# EAGLE board ESP32-C6-WROOM Breakout-Panel (EAGLE 9.6.2)
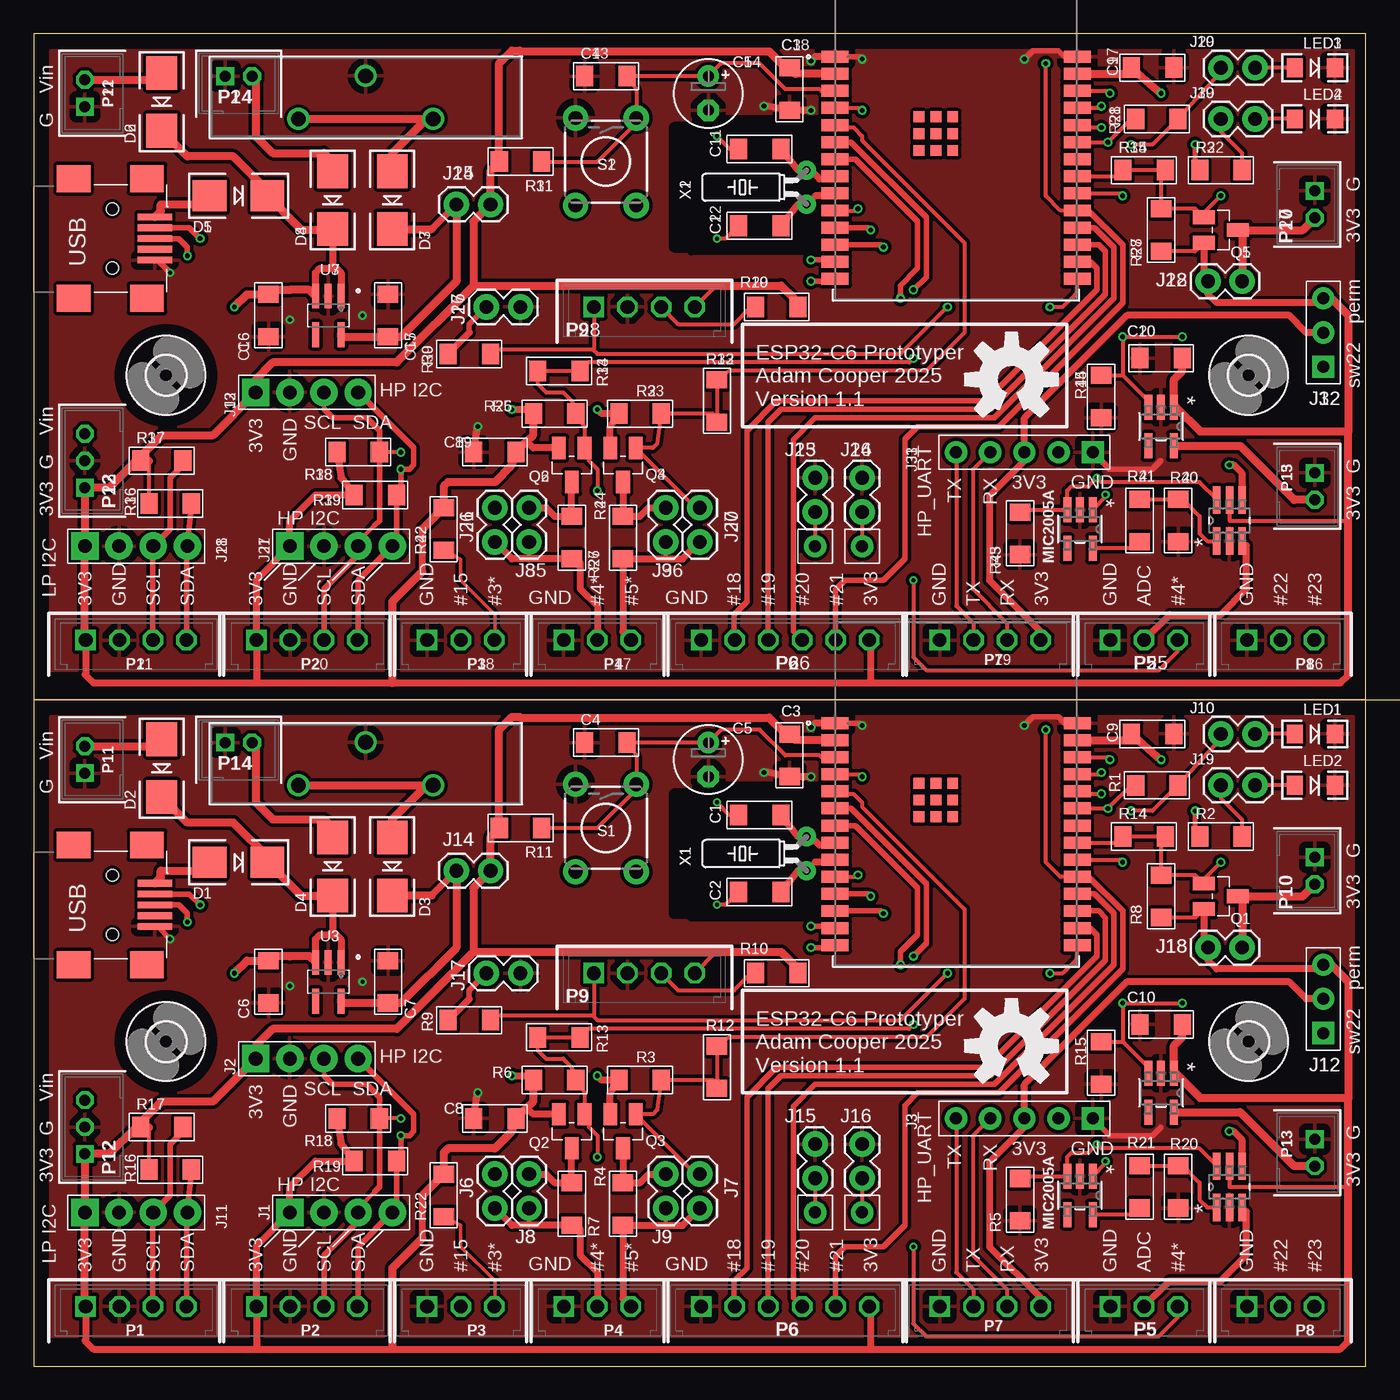
[diagram p0: board, top side]
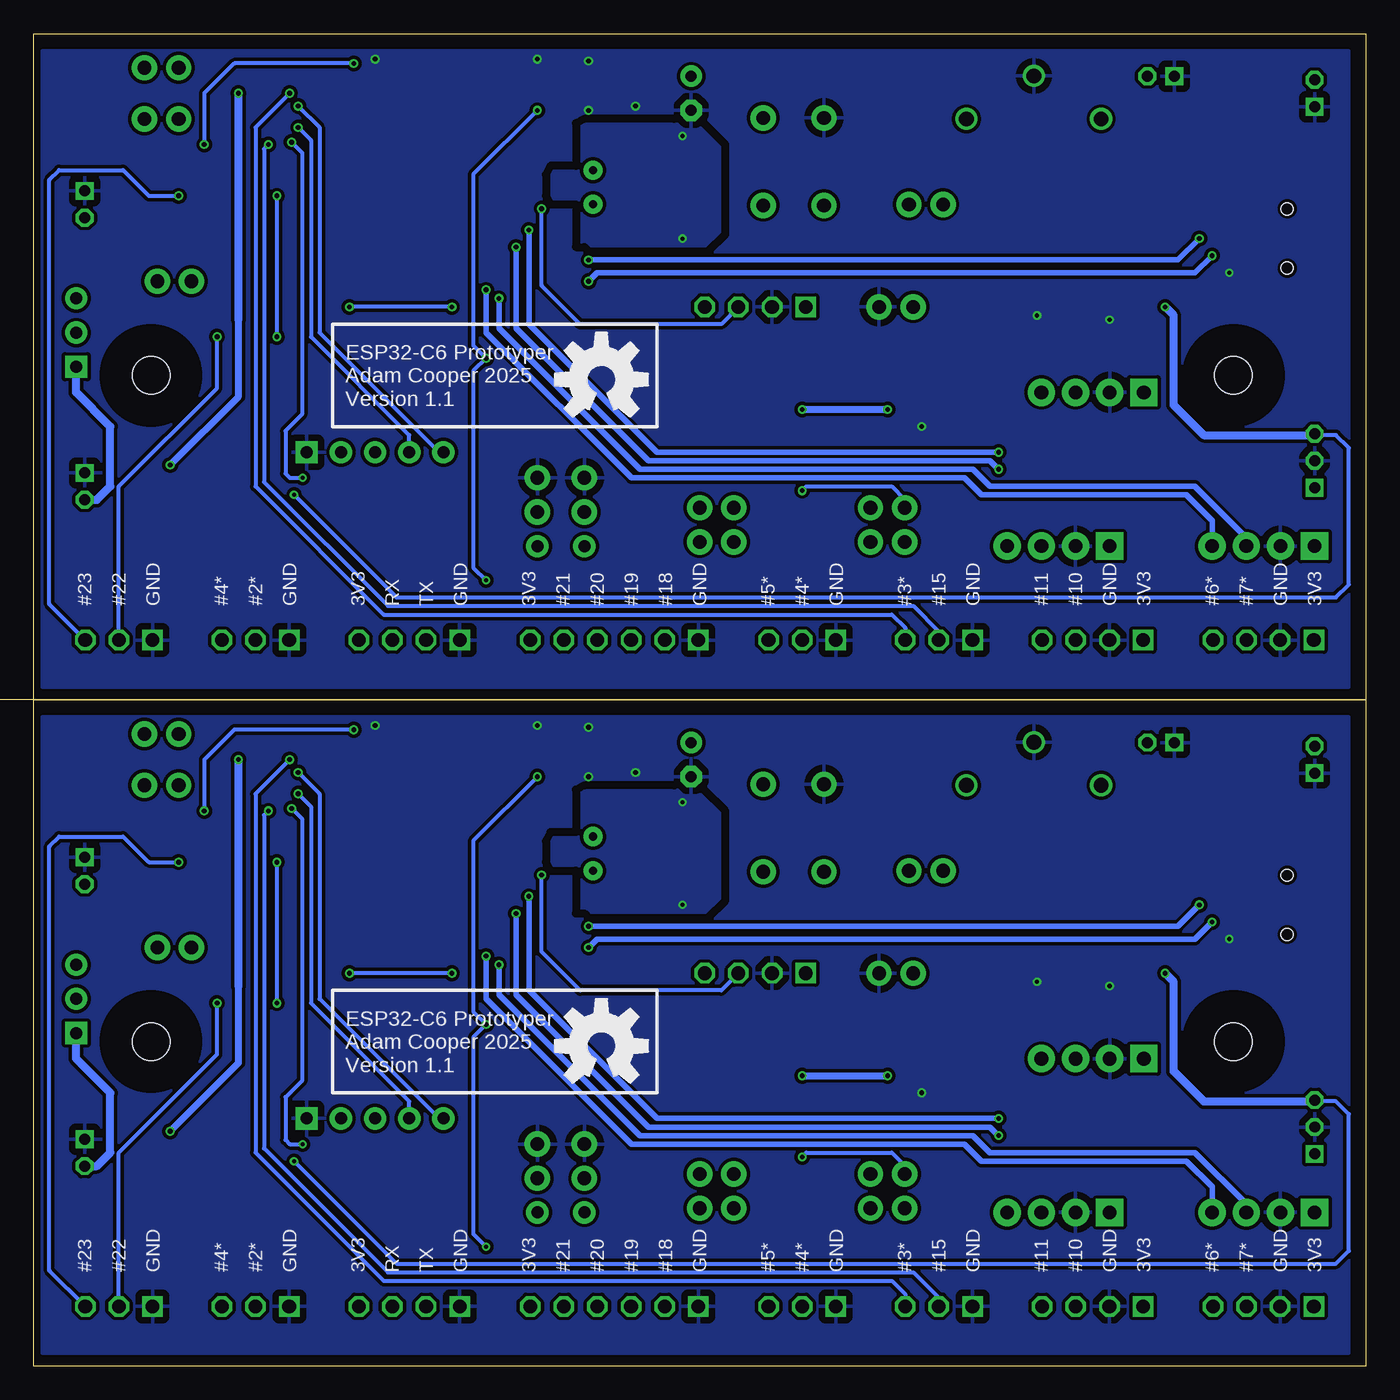
[diagram p1: board, bottom side, seen from below]

Size 99.05 x 99.04 mm. Coordinates in mm from the lower left corner, seen from the top.
Outline: 99.05,49.52 99.05,0 0,0 0,49.52
Outline: 99.05,49.52 0,49.52
Outline: 0,49.52 99.05,49.52
Outline: 99.05,49.52 99.05,99.04 0,99.04 0,49.52
Copper layers (1*16): Top 0.035mm / dielectric 1.5mm / Bottom 0.035mm
Design rules "Seeed Fusion_eagle_rule_v1.1 *": minimum track width 6mil, minimum drill 12mil, track to track 6mil, track to pad 6mil, pad to pad 6mil, via to via 6mil, smd to smd 0mil, copper to edge 10mil, drill to drill 10mil, minimum pad ring 10mil, minimum via ring 6mil, stop-mask expansion 2mil, vias tented up to drill 100mil, thermal gap 20mil
tRestrict: area 47.6,33.7 to 58.4,42.5; area 47.6,83.2 to 58.4,92.1; 16 lines
bRestrict: 30 lines
Milling: 1 lines

## Footprints (pad centres in the part's own frame; a part is rotated, then mirrored left to right if it is on the bottom)
COIN_2-1775485-1_TEC = drill 1.092 pad 1.6: 1 0,0; 2 5.004,3.2; 3 10.008,0
1206 = smd 1.27 x 1.524: 1 -1.575,0; 2 1.575,0
E2,5-5 = drill 0.813 pad 1.6: + -1.27,0 | drill 0.813 pad 1.6 octagon: - 1.27,0
DO-214AA = smd 2.5 x 2.3: A -2.15,0; C 2.15,0
2,8 = hole 2.8: 0,0
4P-2.54-80/40MIL = drill 1.016 pad 2.032 square: 1 0,3.81 | drill 1.016 pad 2.032: 2 0,1.27; 3 0,-1.27; 4 0,-3.81
5P-2.54 = drill 0.889 pad 1.651 square: 1 0,5.08 | drill 0.889 pad 1.651: 2 0,2.54; 3 0,0; 4 0,-2.54; 5 0,-5.08
1P-65/35MIL = drill 0.889 pad 1.651: P$1 0,0
1X02 = drill 1.016 pad 1.88: 1 0,0; 2 2.54,0
3P-2.54 = drill 0.889 pad 1.651 square: 1 0,2.54 | drill 0.889 pad 1.651: 2 0,0; 3 0,-2.54
LED-1206 = smd 1.2 x 1.4: A -1.5,0; C 1.5,0
B4B-EH-A = drill 1.016 square: 1 -3.75,0 | drill 1.016 octagon: 2 -1.25,0; 3 1.25,0; 4 3.75,0
B3B-EH-A = drill 1.016 square: 1 -2.5,0 | drill 1.016 octagon: 2 0,0; 3 2.5,0
B6B-EH-A = drill 1.016 square: 1 -6.25,0 | drill 1.016 octagon: 2 -3.75,0; 3 -1.25,0; 4 1.25,0; 5 3.75,0; 6 6.25,0
B2B-PH-K = drill 0.813 square: 1 -1,0 | drill 0.813 octagon: 2 1,0
B3B-PH-K = drill 0.813 square: 1 -2,0 | drill 0.813 octagon: 2 0,0; 3 2,0
SOT23_LONG = smd 1.016 x 1.651: 1 -0.95,-1.27; 2 0.95,-1.27; 3 0,1.27
TACTILE-PTH = drill 1.016 pad 1.88: 1 -3.251,2.261; 2 3.251,2.261; 3 -3.251,-2.261; 4 3.251,-2.261
DBV6 = smd 2.032 x 0.559: 1 -1.524,0.95; 2 -1.524,0; 3 -1.524,-0.95; 4 1.524,-0.95; 5 1.524,0; 6 1.524,0.95
MOD28_ESP32-C6-WROOM-1_LONG = smd 2.007 x 0.889: 1 -9.004,5.26; 2 -9.004,3.99; 3 -9.004,2.72; 4 -9.004,1.45; 5 -9.004,0.18; 6 -9.004,-1.09; 7 -9.004,-2.36; 8 -9.004,-3.63; 9 -9.004,-4.9; 10 -9.004,-6.17; 11 -9.004,-7.44; 12 -9.004,-8.71; 13 -9.004,-9.98; 14 -9.004,-11.25; 15 9.004,-11.25; 16 9.004,-9.98; 17 9.004,-8.71; 18 9.004,-7.44; 19 9.004,-6.17; 20 9.004,-4.9; 21 9.004,-3.63; 22 9.004,-2.36; 23 9.004,-1.09; 24 9.004,0.18; 25 9.004,1.45; 26 9.004,2.72; 27 9.004,3.99; 28 9.004,5.26 | smd 0.813 x 0.813: 29 -1.505,-0.46; 30 -2.755,0.79; 31 -2.755,-0.46; 32 -2.755,-1.71; 33 -1.505,-1.71; 34 -0.255,-1.71; 35 -0.255,-0.46; 36 -0.255,0.79; 37 -1.505,0.79
SOT95-LONGPADS = smd 1.858 x 0.6: 1 -1.439,0.95; 2 -1.439,0; 3 -1.439,-0.95; 4 1.439,-0.95; 5 1.439,0.95
SOT-23-5_M5_MCH-M = smd 1.857 x 0.597: 1 -1.439,0.95; 2 -1.439,0; 3 -1.439,-0.95; 4 1.439,-0.95; 5 1.439,0.95
FCI_USB_B_SMD_LONG = smd 0.5 x 2.54: D+ 0,9.017; D- -0.8,9.017; GND 1.6,9.017; ID 0.8,9.017; VCC -1.6,9.017 | smd 2 x 2.5: SH$1 -4.45,8.43; SH$2 4.45,8.43; SH$3 4.45,2.98; SH$4 -4.45,2.98 | hole 0.9: -2.2,5.85; 2.2,5.85
TC26H = drill 0.6 pad 1.422: 1 -1.27,0; 2 1.27,0

## Placement (x,y rotation side)
BAT1  2-1775485-1  [COIN_2-1775485-1_TEC]  19.68,43.18 0 top
BAT2  2-1775485-1  [COIN_2-1775485-1_TEC]  19.68,92.7 0 top
C1  18p  [1206]  53.98,40.96 0 top
C2  18p  [1206]  53.98,35.24 0 top
C3  100n  [1206]  56.2,45.4 270 top
C4  100n  [1206]  42.55,46.35 0 top
C5  1u  [E2,5-5]  50.16,45.09 270 top
C6  1u  [1206]  17.46,28.57 270 top
C7  1u  [1206]  26.35,28.57 90 top
C8  10u  [1206]  34.29,18.41 180 top
C9  100n  [1206]  83.19,46.99 0 top
C10  10u  [1206]  83.82,25.4 0 top
C11  18p  [1206]  53.98,90.48 0 top
C12  18p  [1206]  53.98,84.76 0 top
C13  100n  [1206]  42.55,95.87 0 top
C14  1u  [E2,5-5]  50.16,94.6 270 top
C15  1u  [1206]  26.35,78.09 90 top
C16  1u  [1206]  17.46,78.09 270 top
C17  100n  [1206]  83.19,96.51 0 top
C18  100n  [1206]  56.2,94.92 270 top
C19  10u  [1206]  34.29,67.93 180 top
C20  10u  [1206]  83.82,74.92 0 top
D1  SL115B  [DO-214AA]  15.24,37.47 0 top
D2  SL115B  [DO-214AA]  9.53,44.45 270 top
D3  SL115B  [DO-214AA]  26.67,37.15 270 top
D4  SL115B  [DO-214AA]  22.23,37.15 270 top
D5  SL115B  [DO-214AA]  15.24,86.98 0 top
D6  SL115B  [DO-214AA]  9.53,93.97 270 top
D7  SL115B  [DO-214AA]  26.67,86.67 270 top
D8  SL115B  [DO-214AA]  22.23,86.67 270 top
H1  MOUNT-HOLE2.8  [2,8]  9.84,24.13 0 top
H2  MOUNT-HOLE2.8  [2,8]  90.32,24.13 0 top
H3  MOUNT-HOLE2.8  [2,8]  9.84,73.65 0 top
H4  MOUNT-HOLE2.8  [2,8]  90.32,73.65 0 top
J1  HP I2C  [4P-2.54-80/40MIL]  22.86,11.43 90 top
J2  HP I2C  [4P-2.54-80/40MIL]  20.32,22.86 90 top
J3  HP_UART  [5P-2.54]  73.66,18.41 270 top
J4  [1P-65/35MIL]  58.1,11.43 0 top
J5  [1P-65/35MIL]  61.59,11.43 0 top
J6  [1X02]  34.29,11.75 90 top
J7  [1X02]  49.53,11.75 90 top
J8  [1X02]  36.83,14.29 270 top
J9  [1X02]  46.99,14.29 270 top
J10  [1X02]  90.81,46.99 180 top
J11  LP I2C  [4P-2.54-80/40MIL]  7.62,11.43 90 top
J12  UART Vcc  [3P-2.54]  95.89,27.3 180 top
J13  HP I2C  [4P-2.54-80/40MIL]  20.32,72.38 90 top
J14  I_measure  [1X02]  31.43,36.83 0 top
J15  [1X02]  58.1,13.97 90 top
J16  [1X02]  61.59,13.97 90 top
J17  BOOT  [1X02]  33.66,29.21 0 top
J18  [1X02]  87.31,31.11 0 top
J19  [1X02]  90.81,43.18 180 top
J20  [1X02]  49.53,61.27 90 top
J21  [1X02]  34.29,61.27 90 top
J22  [1X02]  87.31,80.63 0 top
J23  [1X02]  58.1,63.49 90 top
J24  [1X02]  61.59,63.49 90 top
J25  I_measure  [1X02]  31.43,86.35 0 top
J26  BOOT  [1X02]  33.66,78.73 0 top
J27  HP I2C  [4P-2.54-80/40MIL]  22.86,60.95 90 top
J28  LP I2C  [4P-2.54-80/40MIL]  7.62,60.95 90 top
J29  [1X02]  90.81,96.51 180 top
J30  [1X02]  90.81,92.7 180 top
J31  HP_UART  [5P-2.54]  73.66,67.93 270 top
J32  UART Vcc  [3P-2.54]  95.89,76.82 180 top
J33  [1P-65/35MIL]  58.1,60.95 0 top
J34  [1P-65/35MIL]  61.59,60.95 0 top
J35  [1X02]  36.83,63.81 270 top
J36  [1X02]  46.99,63.81 270 top
LED1  [LED-1206]  95.25,46.99 0 top
LED2  [LED-1206]  95.25,43.18 0 top
LED3  [LED-1206]  95.25,96.51 0 top
LED4  [LED-1206]  95.25,92.7 0 top
LOGO1  OSHW-LOGOL  [OSHW-LOGO-L]  72.71,23.81 0 top
LOGO2  OSHW-LOGOL  [OSHW-LOGO-L]  56.83,23.81 0 bottom
LOGO3  OSHW-LOGOL  [OSHW-LOGO-L]  72.71,73.33 0 top
LOGO4  OSHW-LOGOL  [OSHW-LOGO-L]  56.83,73.33 0 bottom
P1  LP_I2C  [B4B-EH-A]  7.62,4.45 0 top
P2  HP_I2C  [B4B-EH-A]  20.32,4.45 0 top
P3  CTRL  [B3B-EH-A]  31.75,4.45 0 top
P4  HI DRV/CNT  [B3B-EH-A]  41.91,4.45 0 top
P5  ADC (ext batt)  [B3B-EH-A]  82.55,4.45 0 top
P6  GPIO-A1  [B6B-EH-A]  55.88,4.45 0 top
P7  HP_UART  [B4B-EH-A]  71.12,4.45 0 top
P8  GPIO-A2  [B3B-EH-A]  92.71,4.45 0 top
P9  GPIO-B  [B4B-EH-A]  45.4,29.21 0 top
P10  Pwr Sw 23  [B2B-PH-K]  95.25,36.83 270 top
P11  Battery  [B2B-PH-K]  3.81,45.09 90 top
P12  Pwr Out  [B3B-PH-K]  3.81,17.78 90 top
P13  Pwr Sw 22  [B2B-PH-K]  95.25,15.88 270 top
P14  Backup  [B2B-PH-K]  15.24,46.35 0 top
P15  Pwr Sw 22  [B2B-PH-K]  95.25,65.39 270 top
P16  GPIO-A2  [B3B-EH-A]  92.71,53.96 0 top
P17  HI DRV/CNT  [B3B-EH-A]  41.91,53.96 0 top
P18  CTRL  [B3B-EH-A]  31.75,53.96 0 top
P19  HP_UART  [B4B-EH-A]  71.12,53.96 0 top
P20  HP_I2C  [B4B-EH-A]  20.32,53.96 0 top
P21  LP_I2C  [B4B-EH-A]  7.62,53.96 0 top
P22  Battery  [B2B-PH-K]  3.81,94.6 90 top
P23  Pwr Out  [B3B-PH-K]  3.81,67.3 90 top
P24  Backup  [B2B-PH-K]  15.24,95.87 0 top
P25  ADC (ext batt)  [B3B-EH-A]  82.55,53.96 0 top
P26  GPIO-A1  [B6B-EH-A]  55.88,53.96 0 top
P27  Pwr Sw 23  [B2B-PH-K]  95.25,86.35 270 top
P28  GPIO-B  [B4B-EH-A]  45.4,78.73 0 top
Q1  FDN338P  [SOT23_LONG]  88.27,34.92 270 top
Q2  FDN338P  [SOT23_LONG]  40.01,17.46 180 top
Q3  FDN338P  [SOT23_LONG]  43.81,17.46 180 top
Q4  FDN338P  [SOT23_LONG]  43.81,66.98 180 top
Q5  FDN338P  [SOT23_LONG]  88.27,84.44 270 top
Q6  FDN338P  [SOT23_LONG]  40.01,66.98 180 top
R1  [1206]  83.5,43.18 180 top
R2  [1206]  88.27,39.37 0 top
R3  10k  [1206]  45.09,21.27 180 top
R4  [1206]  43.81,12.06 270 top
R5  10k  [1206]  73.34,12.38 270 top
R6  10k  [1206]  38.73,21.27 180 top
R7  [1206]  40.01,12.06 270 top
R8  10k  [1206]  83.82,34.92 270 top
R9  470  [1206]  32.38,25.72 0 top
R10  3k3  [1206]  55.24,29.21 0 top
R11  10k  [1206]  36.2,40.01 180 top
R12  [1206]  50.8,22.23 90 top
R13  [1206]  39.05,24.45 0 top
R14  [1206]  82.55,39.37 0 top
R15  10k  [1206]  79.38,22.54 270 top
R16  4k7  [1206]  10.16,14.61 0 top
R17  4k7  [1206]  9.53,17.78 0 top
R18  4k7  [1206]  24.13,18.41 180 top
R19  4k7  [1206]  25.4,15.24 180 top
R20  10k  [1206]  85.09,13.34 270 top
R21  22k  [1206]  82.23,13.34 270 top
R22  22k  [1206]  30.48,12.7 90 top
R23  10k  [1206]  45.09,70.79 180 top
R24  [1206]  43.81,61.58 270 top
R25  10k  [1206]  38.73,70.79 180 top
R26  [1206]  40.01,61.58 270 top
R27  10k  [1206]  83.82,84.44 270 top
R28  [1206]  83.5,92.7 180 top
R29  3k3  [1206]  55.24,78.73 0 top
R30  470  [1206]  32.38,75.24 0 top
R31  10k  [1206]  36.2,89.52 180 top
R32  [1206]  88.27,88.89 0 top
R33  [1206]  50.8,71.74 90 top
R34  [1206]  39.05,73.97 0 top
R35  [1206]  82.55,88.89 0 top
R36  4k7  [1206]  10.16,64.12 0 top
R37  4k7  [1206]  9.53,67.3 0 top
R38  4k7  [1206]  24.13,67.93 180 top
R39  4k7  [1206]  25.4,64.76 180 top
R40  10k  [1206]  85.09,62.85 270 top
R41  22k  [1206]  82.23,62.85 270 top
R42  22k  [1206]  30.48,62.22 90 top
R43  10k  [1206]  73.34,61.9 270 top
R44  10k  [1206]  79.38,72.06 270 top
S1  RESET  [TACTILE-PTH]  42.55,40.01 270 top
S2  RESET  [TACTILE-PTH]  42.55,89.52 270 top
U1  74LVC1G3157  [DBV6]  88.9,13.34 90 top
U2  ESP32-C6-WROOM-1-N4LONG  [MOD28_ESP32-C6-WROOM-1_LONG]  68.58,42.55 0 top
U3  RT9080-33  [SOT95-LONGPADS]  21.91,28.57 270 top
U4  MIC2005A-1YM5  [SOT-23-5_M5_MCH-M]  83.82,20.32 270 top
U5  MIC2005A-1YM5  [SOT-23-5_M5_MCH-M]  77.79,12.7 270 top
U6  ESP32-C6-WROOM-1-N4LONG  [MOD28_ESP32-C6-WROOM-1_LONG]  68.58,92.06 0 top
U7  RT9080-33  [SOT95-LONGPADS]  21.91,78.09 270 top
U8  74LVC1G3157  [DBV6]  88.9,62.85 90 top
U9  MIC2005A-1YM5  [SOT-23-5_M5_MCH-M]  83.82,69.84 270 top
U10  MIC2005A-1YM5  [SOT-23-5_M5_MCH-M]  77.79,62.22 270 top
USB1  [FCI_USB_B_SMD_LONG]  0,34.29 270 top
USB2  [FCI_USB_B_SMD_LONG]  0,83.81 270 top
X1  CFS-20632768EZFB  [TC26H]  57.47,38.1 90 top
X2  CFS-20632768EZFB  [TC26H]  57.47,87.62 90 top

## Library data of the parts
BAT1 BAT2 C1-C20 D1-D8 H1-H4 J6-J10 J14-J26 J29 J30 J35 J36 LED1-LED4 LOGO1-LOGO4 Q1-Q6 R1-R44 S1 S2 USB1 USB2 X1 X2 = Master 2016
J1-J5 J11-J13 J27 J28 J31-J34 = Connector
P1-P9 P16-P21 P25 P26 P28 = con-jst-eh
P10-P15 P22-P24 P27 = con-jst-ph
U1 U8 = ESP32 Projects; COPYRIGHT: Copyright (C) 2025 Ultra Librarian. All rights reserved.; MANUFACTURER_PART_NUMBER: SN74LVC1G3157DBVR; MFR_NAME: Texas Instruments
U2 U6 = SMD Stamp Modules
U3 U7 = AP2112K-3.3TRG1
U4 U5 U9 U10 = ESP32 Projects; COPYRIGHT: Copyright (C) 2025 Ultra Librarian. All rights reserved.; MANUFACTURER_NAME: Microchip; MANUFACTURER_PART_NUMBER: MIC2005A-1YM5-TR

## Nets
ADC: C9.1 U1.4 U2.27
ADC1: C17.1 U6.27 U8.4
ADC_EXT: P5.2 U1.3
ADC_EXT1: P25.2 U8.3
CHIP_EN: C4.2 C5.+ R11.1 S1.1 U2.3
CHIP_EN1: C13.2 C14.+ R31.1 S2.1 U6.3
GND: BAT1.2 C1.1 C2.1 C3.2 C4.1 C5.- C6.2 C7.2 C8.2 C9.2 C10.1 J1.2 J2.2 J3.1 J11.2 J15.2 J16.2 J17.2 LED1.C LED2.C P1.2 P2.2 P3.1 P4.1 P5.1 P6.1 P7.1 P8.1 P9.2 P10.1 P11.1 P12.2 P13.1 P14.1 R5.2 R15.2 R20.2 S1.3 U1.2 U2.1 U2.28 U3.2 U4.2 U5.2 USB1.GND
GND1: BAT2.2 C11.1 C12.1 C13.1 C14.- C15.2 C16.2 C17.2 C18.2 C19.2 C20.1 J13.2 J23.2 J24.2 J26.2 J27.2 J28.2 J31.1 LED3.C LED4.C P15.1 P16.1 P17.1 P18.1 P19.1 P20.2 P21.2 P22.1 P23.2 P24.1 P25.1 P26.1 P27.1 P28.2 R40.2 R43.2 R44.2 S2.3 U6.1 U6.28 U7.2 U8.2 U9.2 U10.2 USB2.GND
GPIO0: C1.2 U2.8 X1.2
GPIO1: C2.2 U2.9 X1.1
GPIO2: USB2.D+
GPIO3: U6.13 USB2.D-
GPIO4: C11.2 U6.8 X2.2
GPIO5: C12.2 U6.9 X2.1
GPIO6: R28.2 R43.1 U6.23 U8.6 U10.3
GPIO7: P28.3 R29.1 U6.10
GPIO8: P9.3 R10.1 U2.10
GPIO9: P9.1 R9.2 U2.15
GPIO10: J1.3 J2.3 P2.3 R18.1 U2.11
GPIO11: J1.4 J2.4 P2.4 R19.1 U2.12
GPIO12: U2.13 USB1.D-
GPIO13: U2.14 USB1.D+
GPIO14: P28.1 R30.2 U6.15
GPIO15: R1.2 R5.1 U1.6 U2.23 U5.3
GPIO15_R: J10.2 P3.2 R1.1
GPIO15_R1: J29.2 P18.2 R28.1
GPIO16: J13.3 J27.3 P20.3 R38.1 U6.11
GPIO17: J13.4 J27.4 P20.4 R39.1 U6.12
GPIO18: P6.2 U2.16
GPIO19: P6.3 U2.17
GPIO20: P6.4 U2.18
GPIO21: P6.5 R2.1 U2.19
GPIO22: P8.2 R15.1 U2.20 U4.3
GPIO23: P8.3 Q1.1 R8.1 R14.1 R14.2 U2.21
GPIO24: P26.2 U6.16
GPIO25: P26.3 U6.17
GPIO26: P26.4 U6.18
GPIO27: P26.5 R32.1 U6.19
GPIO28: P16.2 R44.1 U6.20 U9.3
GPIO29: P16.3 Q5.1 R27.1 R35.1 R35.2 U6.21
LP_GPIO1: P18.3 R42.1 U6.26
LP_GPIO2: J21.2 P25.3 Q6.1 R25.1 R34.1 R34.2 U6.4
LP_GPIO3: P3.3 R22.1 U2.26
LP_GPIO4: J6.2 P5.3 Q2.1 R6.1 R13.1 R13.2 U2.4
LP_GPIO4_P: J6.1 J8.2 P4.2 R7.2
LP_GPIO4_P1: J21.1 J35.2 P17.2 R26.2
LP_GPIO5: J7.2 Q3.1 R3.1 R12.1 R12.2 U2.5
LP_GPIO5_P: J7.1 J9.2 P4.3 R4.2
LP_GPIO5_P1: J20.1 J36.2 P17.3 R24.2
LP_GPIO6: J11.4 P1.4 R16.2 U2.6
LP_GPIO7: J11.3 P1.3 R17.2 U2.7
LP_GPIO8: J20.2 Q4.1 R23.1 R33.1 R33.2 U6.5
LP_GPIO9: J28.4 P21.4 R36.2 U6.6
LP_GPIO10: J28.3 P21.3 R37.2 U6.7
N$1: J17.1 R9.1
N$2: D2.A P11.2
N$3: D1.A USB1.VCC
N$4: D4.A P14.2
N$5: J18.2 P10.2 Q1.3
N$6: BAT1.1 BAT1.3 D3.A
N$7: J9.1 Q3.3 R4.1
N$8: J10.1 LED1.A
N$9: J5.P$1 J16.1
N$10: J19.2 R2.2
N$11: J19.1 LED2.A
N$12: J8.1 Q2.3 R7.1
N$13: C7.1 D3.C J14.1 U3.5
N$14: D5.A USB2.VCC
N$15: R21.2 U5.5
N$16: J4.P$1 J15.1
N$17: J36.1 Q4.3 R24.1
N$18: J35.1 Q6.3 R26.1
N$19: J26.1 R30.1
N$20: BAT2.1 BAT2.3 D7.A
N$21: J29.1 LED3.A
N$22: J30.2 R32.2
N$23: J30.1 LED4.A
N$24: C15.1 D7.C J25.1 U7.5
N$25: J24.1 J34.P$1
N$26: J23.1 J33.P$1
N$27: D8.A P24.2
N$28: D6.A P22.2
N$29: J22.2 P27.2 Q5.3
N$30: R41.2 U10.5
PWR_SW_1: J32.1 P15.2 U9.5
PWR_SW_22: J12.1 P13.2 U4.5
RX: J3.4 P7.3 U2.24
RX1: J31.4 P19.3 U6.24
TX: J3.5 P7.2 U2.25
TX1: J31.5 P19.2 U6.25
UART_VCC: J3.3 J12.2 P7.4
UART_VCC1: J31.3 J32.2 P19.4
VCC: C3.1 C8.1 C10.2 J1.1 J2.1 J11.1 J12.3 J14.2 J18.1 P1.1 P2.1 P6.6 P9.4 P12.1 Q1.2 Q2.2 Q3.2 R3.2 R6.2 R8.2 R10.2 R11.2 R16.1 R17.1 R18.2 R19.2 R22.2 U1.5 U2.2 U4.1
VCC1: C18.1 C19.1 C20.2 J13.1 J22.1 J25.2 J27.1 J28.1 J32.3 P20.1 P21.1 P23.1 P26.6 P28.4 Q4.2 Q5.2 Q6.2 R23.2 R25.2 R27.2 R29.2 R31.2 R36.1 R37.1 R38.2 R39.2 R42.2 U6.2 U8.5 U9.1
VIN: C6.1 D1.C D2.C D4.C P12.3 U3.1 U3.3 U5.1
VIN1: C16.1 D5.C D6.C D8.C P23.3 U7.3 U10.1
VIN_DIV: R20.1 R21.1 U1.1
VIN_DIV1: R40.1 R41.1 U8.1

## Tracks (layer width: path | path; a pad name or v marks a point on that pad's centre or on a via)
ADC  (via drill 0.35)
  Top 0.152: 81.46,46.53 C9.1
  Top 0.508: U1.4 89.85,16.83 89.22,17.46 v88.9,17.46
  Top 0.61: U2.27 81.46,46.53 | C9.1 v83.82,45.09
  Bottom 0.508: v88.9,17.46 83.82,22.54 83.82,28.26
  Bottom 0.61: 83.82,28.26 v83.82,45.09
ADC1  (via drill 0.35)
  Top 0.152: 81.46,96.06 C17.1
  Top 0.508: U8.4 89.85,66.35 89.22,66.98 v88.9,66.98
  Top 0.61: U6.27 81.46,96.06 | C17.1 v83.82,94.61
  Bottom 0.508: v88.9,66.98 83.82,72.06 83.82,77.78
  Bottom 0.61: 83.82,77.78 v83.82,94.61
ADC_EXT
  Top 0.305: 90.17,11.49 U1.3
  Top 0.508: P5.2 84.45,6.35 88.27,6.35 90.17,8.26 90.17,11.49
ADC_EXT1
  Top 0.305: 90.17,61.01 U8.3
  Top 0.508: P25.2 84.45,55.87 88.27,55.87 90.17,57.77 90.17,61.01
CHIP_EN
  Top 0.305: U2.3 58.56,45.27 58.42,45.4 55.88,45.4 53.98,47.31 51.12,47.31 C5.+ C4.2 44.81,45.36 S1.1 44.81,42.9 41.91,40.01 R11.1
CHIP_EN1
  Top 0.305: U6.3 58.56,94.78 58.42,94.92 55.88,94.92 53.98,96.83 51.12,96.83 C14.+ C13.2 44.81,94.88 S2.1 44.81,92.42 41.91,89.53 R31.1
GND  (via drill 0.3 pad 0.61, 0.35)
  Top 0.305: U2.28 76.66,47.8 | 58.1,47.8 v57.78,47.49 | C1.1 51.75,40.96 v50.8,41.91 | C2.1 51.45,34.29 v50.8,34.29
  Top 0.406: U2.1 61.41,47.8 v61.59,47.62 | 76.66,47.8 76.2,48.26 74.3,48.26 v73.66,47.62 | 83.82,17.78 83.19,17.14 80.01,17.14 J3.1 | USB1.GND 9.22,32.69 v10.16,31.75
  Top 0.508: v54.29,44.13 54.39,44.17 C3.2 57.19,43.83 57.2,43.76 57.25,43.81 v57.78,43.81 | U2.1 58.1,47.8 | C8.2 v33.02,20.32
  Top 0.61: 82.55,25.4 C10.1 | C6.2 17.79,27 | C7.2 26.02,30.15
  other vias: 19.05,28.26 24.45,28.57
  pour Bottom (isolate 0.254): 1.27,48.26 1.27,0.95 98.42,0.95 98.42,48.26
  pour Top (isolate 0.254): 1.27,48.26 1.27,2.22 98.11,2.22 98.11,48.26
GND1  (via drill 0.3 pad 0.61, 0.35)
  Top 0.305: U6.28 76.66,97.33 | 58.1,97.33 v57.78,97.01 | C11.1 51.75,90.48 v50.8,91.43 | C12.1 51.45,83.81 v50.8,83.81
  Top 0.406: U6.1 61.41,97.33 v61.59,97.14 | 76.66,97.33 76.2,97.78 74.3,97.78 v73.66,97.14 | 83.82,67.3 83.19,66.67 80.01,66.67 J31.1 | USB2.GND 9.22,82.21 v10.16,81.27
  Top 0.508: v54.29,93.65 54.39,93.69 C18.2 57.19,93.35 57.2,93.28 57.25,93.33 v57.78,93.33 | U6.1 58.1,97.33 | C19.2 v33.02,69.84
  Top 0.61: 82.55,74.92 C20.1 | C16.2 17.79,76.52 | C15.2 26.02,79.67
  other vias: 19.05,77.78 24.45,78.09
  pour Bottom (isolate 0.254): 1.27,97.78 1.27,50.47 98.42,50.47 98.42,97.78
  pour Top (isolate 0.254): 1.27,97.78 1.27,51.74 98.11,51.74 98.11,97.78
GPIO0
  Top 0.305: 56.83,39.37 X1.2 57.78,39.05 58.1,39.05 | 58.42,38.73 59.65,38.73 U2.8
  Top 0.508: 56.83,39.37 C1.2 | 58.1,39.05 58.42,38.73
GPIO1
  Top 0.305: U2.9 59.65,37.47 | 58.1,37.47 X1.1 56.83,36.83
  Top 0.508: 59.65,37.47 58.1,37.47 | 56.83,36.83 C2.2
GPIO2  (via drill 0.35)
  Top 0.406: v57.78,80.64 59.65,80.64 | USB2.D+ 10.79,83.81 11.43,83.17 v11.43,82.54
  Bottom 0.406: v57.78,80.64 57.15,81.27 12.7,81.27 v11.43,82.54
GPIO3  (via drill 0.35)
  Top 0.305: U6.13 59.69,82.22
  Top 0.406: 59.69,82.22 v57.78,82.22 | USB2.D- 11.58,84.61 v12.38,83.81
  Bottom 0.406: v12.38,83.81 13.97,82.22 v57.78,82.22
GPIO4
  Top 0.305: 56.83,88.89 X2.2 57.78,88.57 58.1,88.57 | 58.42,88.25 59.65,88.25 U6.8
  Top 0.508: 56.83,88.89 C11.2 | 58.1,88.57 58.42,88.25
GPIO5
  Top 0.305: U6.9 59.65,86.98 | 58.1,86.98 X2.1 56.83,86.35
  Top 0.508: 59.65,86.98 58.1,86.98 | 56.83,86.35 C12.2
GPIO6  (via drill 0.3 pad 0.61, 0.35)
  Top 0.305: U6.23 v79.87,90.97 81.75,92.85 R28.2 | U8.6 87.95,64.44 86.68,65.71 79.38,65.71 v79.06,66.03 78.42,65.39 77.15,65.39 76.84,65.08 U10.3 73.52,63.66 R43.1
  Bottom 0.305: v79.87,90.97 79.06,90.16 79.06,70.79 80.33,69.52 80.33,66.35 80.01,66.03 v79.06,66.03
GPIO7  (via drill 0.35)
  Top 0.305: U6.10 61.14,85.89 v61.28,86.03 | P28.3 47.92,77.46 52.07,77.46 53.34,78.73 R29.1
  Bottom 0.305: v61.28,86.03 61.28,80.32 58.42,77.46 47.92,77.46 P28.3
GPIO8  (via drill 0.35)
  Top 0.305: U2.10 61.14,36.38 v61.28,36.51 | P9.3 47.92,27.94 52.07,27.94 53.34,29.21 R10.1
  Bottom 0.305: v61.28,36.51 61.28,30.8 58.42,27.94 47.92,27.94 P9.3
GPIO9  (via drill 0.35)
  Top 0.305: v75.56,29.21 76.52,29.21 77.44,30.13 77.58,30.5 U2.15 | v67.94,29.21 64.45,25.72 41.91,25.72 41.59,26.04 | 41.59,26.04 34.28,26.04 R9.2 | P9.1 41.65,26.09 41.59,26.04
  Bottom 0.305: v67.94,29.21 v75.56,29.21
GPIO10  (via drill 0.35)
  Top 0.305: P2.3 21.59,4.46 | 24.13,10.79 J1.3 24.13,11.75 25.35,12.97 25.35,12.98 | 62.05,35.1 v62.23,34.92 | v27.3,18.41 R18.1 | J2.3 21.59,21.59 | 25.72,20 25.7,20
  Top 0.406: 21.59,4.46 21.59,8.26 24.13,10.79 | U2.11 62.05,35.1 | 25.35,12.98 25.7,13.34 R18.1 25.7,20 | 21.59,21.59 22.23,20.95 24.77,20.95 25.72,20
  Bottom 0.406: v62.23,34.92 62.23,27.94 52.7,18.41 v27.3,18.41
GPIO11  (via drill 0.35)
  Top 0.305: P2.4 24.13,4.5 | 63,33.84 v63.18,33.66 | 27.3,15.88 R19.1 | 26.98,11.73 J1.4
  Top 0.406: 24.13,4.5 24.13,8.89 J1.4 | U2.12 63,33.84 | 27.3,15.88 v27.3,17.14 27.94,17.14 28.26,17.46 28.26,18.73 J2.4 | R19.1 26.98,11.73
  Bottom 0.406: v63.18,33.66 63.18,27.62 53.34,17.78 27.94,17.78 v27.3,17.14
GPIO12  (via drill 0.35)
  Top 0.305: U2.13 59.69,32.7
  Top 0.406: 59.69,32.7 v57.78,32.7 | USB1.D- 11.58,35.09 v12.38,34.29
  Bottom 0.406: v12.38,34.29 13.97,32.7 v57.78,32.7
GPIO13  (via drill 0.35)
  Top 0.305: 59.65,31.11 U2.14
  Top 0.406: v57.78,31.11 59.65,31.11 | USB1.D+ 10.79,34.29 11.43,33.66 v11.43,33.02
  Bottom 0.406: v57.78,31.11 57.15,31.75 12.7,31.75 v11.43,33.02
GPIO14  (via drill 0.35)
  Top 0.305: v75.56,78.73 76.52,78.73 77.44,79.65 77.58,80.02 U6.15 | v67.94,78.73 64.45,75.24 41.91,75.24 41.59,75.56 | 41.59,75.56 34.28,75.56 R30.2 | P28.1 41.65,75.61 41.59,75.56
  Bottom 0.305: v67.94,78.73 v75.56,78.73
GPIO15  (via drill 0.3 pad 0.61, 0.35)
  Top 0.305: U2.23 v79.87,41.45 81.75,43.33 R1.2 | U1.6 87.95,14.92 86.68,16.19 79.38,16.19 v79.06,16.51 78.42,15.88 77.15,15.88 76.84,15.56 U5.3 73.52,14.14 R5.1
  Bottom 0.305: v79.87,41.45 79.06,40.64 79.06,21.27 80.33,20 80.33,16.83 80.01,16.51 v79.06,16.51
GPIO15_R  (via drill 0.35)
  Top 0.305: J10.2 88.27,46.65 R1.1 83.19,41.27 v81.6,41.27
  Bottom 0.305: v81.6,41.27 81.92,40.96 81.92,16.19 72.71,6.99 33.66,6.99 31.75,5.08 P3.2
GPIO15_R1  (via drill 0.35)
  Top 0.305: J29.2 88.27,96.17 R28.1 83.19,90.8 v81.6,90.8
  Bottom 0.305: v81.6,90.8 81.92,90.48 81.92,65.71 72.71,56.51 33.66,56.51 31.75,54.6 P18.2
GPIO16  (via drill 0.35)
  Top 0.305: P20.3 21.59,53.98 | 24.13,60.31 J27.3 24.13,61.27 25.35,62.49 25.35,62.5 | 62.05,84.62 v62.23,84.44 | v27.3,67.94 R38.1 | J13.3 21.59,71.11 | 25.72,69.52 25.7,69.52
  Top 0.406: 21.59,53.98 21.59,57.77 24.13,60.31 | U6.11 62.05,84.62 | 25.35,62.5 25.7,62.85 R38.1 25.7,69.52 | 21.59,71.11 22.23,70.47 24.77,70.47 25.72,69.52
  Bottom 0.406: v62.23,84.44 62.23,77.46 52.7,67.94 v27.3,67.94
GPIO17  (via drill 0.35)
  Top 0.305: P20.4 24.13,54.02 | 63,83.36 v63.18,83.17 | 27.3,65.39 R39.1 | 26.98,61.26 J27.4
  Top 0.406: 24.13,54.02 24.13,58.41 J27.4 | U6.12 63,83.36 | 27.3,65.39 v27.3,66.67 27.94,66.67 28.26,66.98 28.26,68.25 J13.4 | R39.1 26.98,61.26
  Bottom 0.406: v63.18,83.17 63.18,77.14 53.34,67.3 27.94,67.3 v27.3,66.67
GPIO18
  Top 0.305: U2.16 78.56,32.56
  Top 0.381: 52.07,4.5 P6.2
  Top 0.406: 78.56,32.56 79.06,32.07 79.06,30.48 70.8,22.23 55.24,22.23 53.02,20 53.02,7.3 52.07,6.35 52.07,4.5
GPIO19
  Top 0.305: P6.3 54.61,4.46
  Top 0.406: U2.17 79.19,33.84 79.69,33.34 79.69,30.16 71.12,21.59 55.56,21.59 54.61,20.64 54.61,4.46
GPIO20
  Top 0.305: P6.4 56.48,5.1
  Top 0.406: U2.18 78.88,35.1 80.33,33.66 80.33,29.84 71.44,20.95 58.1,20.95 56.48,19.33 56.48,5.1
GPIO21  (via drill 0.35)
  Top 0.305: 78.42,36.38 U2.19 76.34,36.38 75.25,37.47 v75.25,47.31 | 59.61,4.46 P6.5
  Top 0.381: R2.1 86.36,39.54 v86.36,41.27
  Top 0.406: 78.42,36.38 80.96,33.84 80.96,29.53 71.75,20.32 65.72,20.32 64.77,19.37 64.77,10.48 63.18,8.89 60.33,8.89 59.61,8.18 59.61,4.46
  Bottom 0.305: v86.36,41.27 86.36,45.09 84.14,47.31 v75.25,47.31
GPIO22  (via drill 0.35)
  Top 0.305: U2.20 80.78,37.65 v80.96,37.47 | v85.41,26.99 v80.96,26.99 80.96,24.13 | U4.3 82.87,22.22 80.96,24.13 | R15.1 80.96,24.13
  Bottom 0.305: v80.96,37.47 v80.96,26.99 | P8.2 92.71,15.88 85.41,23.18 v85.41,26.99
GPIO23  (via drill 0.35)
  Top 0.305: U2.21 80.83,38.91 R14.1 R14.2 83.82,39.06 R8.1 83.84,36.5 83.84,36.51 86.36,36.51 Q1.1 87,36.2 v88.27,37.47
  Bottom 0.305: P8.3 97.88,7.11 97.88,38.65 97.16,39.37 92.39,39.37 90.49,37.47 v88.27,37.47
GPIO24
  Top 0.305: U6.16 78.56,82.08
  Top 0.381: 52.07,54.02 P26.2
  Top 0.406: 78.56,82.08 79.06,81.59 79.06,80 70.8,71.75 55.24,71.75 53.02,69.52 53.02,56.82 52.07,55.87 52.07,54.02
GPIO25
  Top 0.305: P26.3 54.61,53.98
  Top 0.406: U6.17 79.19,83.36 79.69,82.86 79.69,79.68 71.12,71.11 55.56,71.11 54.61,70.16 54.61,53.98
GPIO26
  Top 0.305: P26.4 56.48,54.62
  Top 0.406: U6.18 78.88,84.62 80.33,83.17 80.33,79.36 71.44,70.47 58.1,70.47 56.48,68.85 56.48,54.62
GPIO27  (via drill 0.35)
  Top 0.305: 78.42,85.89 U6.19 76.34,85.89 75.25,86.98 v75.25,96.83 | 59.61,53.98 P26.5
  Top 0.381: R32.1 86.36,89.06 v86.36,90.8
  Top 0.406: 78.42,85.89 80.96,83.36 80.96,79.05 71.75,69.84 65.72,69.84 64.77,68.89 64.77,60 63.18,58.41 60.33,58.41 59.61,57.7 59.61,53.98
  Bottom 0.305: v86.36,90.8 86.36,94.61 84.14,96.83 v75.25,96.83
GPIO28  (via drill 0.35)
  Top 0.305: U6.20 80.78,87.17 v80.96,86.98 | v85.41,76.51 v80.96,76.51 80.96,73.65 | U9.3 82.87,71.74 80.96,73.65 | R44.1 80.96,73.65
  Bottom 0.305: v80.96,86.98 v80.96,76.51 | P16.2 92.71,65.39 85.41,72.7 v85.41,76.51
GPIO29  (via drill 0.35)
  Top 0.305: U6.21 80.83,88.44 R35.1 R35.2 83.82,88.58 R27.1 83.84,86.02 83.84,86.03 86.36,86.03 Q5.1 87,85.72 v88.27,86.98
  Bottom 0.305: P16.3 97.88,56.63 97.88,88.17 97.16,88.89 92.39,88.89 90.49,86.98 v88.27,86.98
LP_GPIO1  (via drill 0.35)
  Top 0.254: R42.1 31.75,59.98 31.75,58.41 34.29,55.87 34.29,54.01 P18.3
  Top 0.305: U6.26 79.83,94.78 v80.01,94.61
  Bottom 0.305: v80.01,94.61 82.55,92.06 82.55,65.39 73.03,55.87 35.24,55.87 34.25,54.88 P18.3
LP_GPIO2  (via drill 0.3 pad 0.61, 0.35)
  Top 0.254: 37.48,73 R34.1
  Top 0.305: R34.1 R34.2 41.26,74.6 65.09,74.6 v65.41,74.92 | U6.4 61.41,93.52 v61.59,93.33 | v41.91,65.08 41.91,66.67 41.27,67.3 41.27,67.93 Q6.1 40.95,69.84 R25.1 40.01,71.75 39.37,72.38 38.1,72.38 37.48,73 | v65.41,58.41 65.41,52.7 66.36,51.74 83.64,51.74 85.05,53.15 P25.3
  Bottom 0.305: v61.59,93.33 66.36,88.57 66.36,75.87 v65.41,74.92 66.36,73.97 66.36,59.36 v65.41,58.41 | J21.2 34.29,64.44 35.24,65.39 41.59,65.39 v41.91,65.08
LP_GPIO3  (via drill 0.35)
  Top 0.254: R22.1 31.75,10.46 31.75,8.89 34.29,6.35 34.29,4.49 P3.3
  Top 0.305: U2.26 79.83,45.27 v80.01,45.09
  Bottom 0.305: v80.01,45.09 82.55,42.55 82.55,15.88 73.03,6.35 35.24,6.35 34.25,5.36 P3.3
LP_GPIO4  (via drill 0.3 pad 0.61, 0.35)
  Top 0.254: 37.48,23.48 R13.1
  Top 0.305: R13.1 R13.2 41.26,25.08 65.09,25.08 v65.41,25.4 | U2.4 61.41,43.99 v61.59,43.81 | v41.91,15.56 41.91,17.14 41.27,17.78 41.27,18.41 Q2.1 40.95,20.32 R6.1 40.01,22.23 39.37,22.86 38.1,22.86 37.48,23.48 | v65.41,8.89 65.41,3.17 66.36,2.22 83.64,2.22 85.05,3.63 P5.3
  Bottom 0.305: v61.59,43.81 66.36,39.05 66.36,26.35 v65.41,25.4 66.36,24.45 66.36,9.84 v65.41,8.89 | J6.2 34.29,14.92 35.24,15.88 41.59,15.88 v41.91,15.56
LP_GPIO4_P
  Top 0.305: R7.2 40.64,10.16 | J8.2 36.83,10.79 36.83,10.49 36.83,10.48
  Top 0.508: 40.64,10.16 40.64,8.26 41.91,6.99 P4.2 | R7.2 36.83,10.49 | 36.83,10.48 35.56,10.48 J6.1
LP_GPIO4_P1
  Top 0.305: R26.2 40.64,59.68 | J35.2 36.83,60.31 36.83,60.01 36.83,60
  Top 0.508: 40.64,59.68 40.64,57.77 41.91,56.51 P17.2 | R26.2 36.83,60.01 | 36.83,60 35.56,60 J21.1
LP_GPIO5
  Top 0.305: J7.2 49.21,14.29 Q3.1 46.04,18.73 46.35,19.05 R3.1 50.48,21.27 R12.1 R12.2 51.75,24.45 66.36,24.45 69.22,27.3 69.22,33.97 61.59,41.59 61.59,41.91 60.96,42.55 60.01,42.55 U2.5
LP_GPIO5_P
  Top 0.305: J9.2 46.99,10.79 46.99,10.49 46.99,10.48
  Top 0.508: P4.3 43.81,5.04 R4.2 46.99,10.49 | 46.99,10.48 48.26,10.48 J7.1
LP_GPIO5_P1
  Top 0.305: J36.2 46.99,60.31 46.99,60.01 46.99,60
  Top 0.508: P17.3 43.81,54.56 R24.2 46.99,60.01 | 46.99,60 48.26,60 J20.1
LP_GPIO6  (via drill 0.35)
  Top 0.305: 11.37,11.37 J11.4
  Top 0.406: P1.4 11.37,11.37 | J11.4 R16.2 | U2.6 60.78,41.45 66.36,35.88 66.36,31.43 v65.41,30.48
  Bottom 0.406: v65.41,30.48 65.41,27.3 54.61,16.51 29.84,16.51 28.57,15.24 13.34,15.24 11.43,13.34 J11.4
LP_GPIO7  (via drill 0.35)
  Top 0.305: 8.87,11.41 J11.3 | R17.2 10.79,17.14
  Top 0.406: P1.3 8.87,11.41 | 10.79,17.14 10.16,16.51 10.16,12.7 J11.3 | U2.7 61.1,40.19 65.72,35.56 65.72,32.07 64.45,30.8 v64.45,29.84
  Bottom 0.406: v64.45,29.84 64.45,27.62 53.98,17.14 29.21,17.14 27.94,15.88 12.7,15.88 8.89,12.06 J11.3
LP_GPIO8
  Top 0.305: J20.2 49.21,63.81 Q4.1 46.04,68.25 46.35,68.57 R23.1 50.48,70.79 R33.1 R33.2 51.75,73.97 66.36,73.97 69.22,76.83 69.22,83.49 61.59,91.11 61.59,91.43 60.96,92.06 60.01,92.06 U6.5
LP_GPIO9  (via drill 0.35)
  Top 0.305: 11.37,60.89 J28.4
  Top 0.406: P21.4 11.37,60.89 | J28.4 R36.2 | U6.6 60.78,90.97 66.36,85.4 66.36,80.95 v65.41,80
  Bottom 0.406: v65.41,80 65.41,76.83 54.61,66.03 29.84,66.03 28.57,64.76 13.34,64.76 11.43,62.85 J28.4
LP_GPIO10  (via drill 0.35)
  Top 0.305: 8.87,60.93 J28.3 | R37.2 10.79,66.67
  Top 0.406: P21.3 8.87,60.93 | 10.79,66.67 10.16,66.03 10.16,62.22 J28.3 | U6.7 61.1,89.7 65.72,85.08 65.72,81.59 64.45,80.32 v64.45,79.36
  Bottom 0.406: v64.45,79.36 64.45,77.14 53.98,66.67 29.21,66.67 27.94,65.39 12.7,65.39 8.89,61.59 J28.3
N$1
  Top 0.406: J17.1 32.38,27.94 32.38,27.29
  Top 0.508: 32.38,27.29 R9.1
N$2
  Top 0.61: P11.2 9.01,46.09 D2.A
N$3
  Top 0.305: 12.7,36.83 13.09,37.22 D1.A
  Top 0.61: USB1.VCC 9.46,36.34 9.46,36.83 12.7,36.83
N$4
  Top 0.61: P14.2 16.51,46.09 16.51,41.91 17.78,40.64 21.59,40.64 22.23,40.01 D4.A
N$5
  Top 0.61: P10.2 94.34,34.92 Q1.3 89.85,34.61 J18.2
N$6
  Top 0.61: BAT1.1 29.21,43.18 | 29.21,43.18 BAT1.3 | D3.A 26.67,40.64 29.21,43.18
N$7
  Top 0.508: Q3.3 R4.1 45.08,13.64 45.09,13.65 45.72,14.29 J9.1
N$8
  Top 0.305: LED1.A J10.1
N$9
  Top 0.305: J16.1 J5.P$1
N$10
  Top 0.305: J19.2 88.27,42.23 89.84,40.65 R2.2
N$11
  Top 0.305: LED2.A J19.1
N$12
  Top 0.508: Q2.3 R7.1 38.74,13.64 38.73,13.65 38.1,14.29 J8.1
N$13
  Top 0.508: 29.6,35 J14.1
  Top 0.61: D3.C 29.6,35 | J14.1 31.43,31.11 27.32,27 C7.1 22.99,27 U3.5
N$14
  Top 0.305: 12.7,86.35 13.09,86.74 D5.A
  Top 0.61: USB2.VCC 9.46,85.86 9.46,86.35 12.7,86.35
N$15
  Top 0.305: R21.2 81.73,11.26 U5.5
N$16
  Top 0.305: J15.1 J4.P$1
N$17
  Top 0.508: Q4.3 R24.1 45.08,63.16 45.09,63.17 45.72,63.81 J36.1
N$18
  Top 0.508: Q6.3 R26.1 38.74,63.16 38.73,63.17 38.1,63.81 J35.1
N$19
  Top 0.406: J26.1 32.38,77.46 32.38,76.81
  Top 0.508: 32.38,76.81 R30.1
N$20
  Top 0.61: BAT2.1 29.21,92.7 | 29.21,92.7 BAT2.3 | D7.A 26.67,90.16 29.21,92.7
N$21
  Top 0.305: LED3.A J29.1
N$22
  Top 0.305: J30.2 88.27,91.75 89.84,90.17 R32.2
N$23
  Top 0.305: LED4.A J30.1
N$24
  Top 0.508: 29.6,84.52 J25.1
  Top 0.61: D7.C 29.6,84.52 | J25.1 31.43,80.64 27.32,76.52 C15.1 22.99,76.52 U7.5
N$25
  Top 0.305: J24.1 J34.P$1
N$26
  Top 0.305: J23.1 J33.P$1
N$27
  Top 0.61: P24.2 16.51,95.61 16.51,91.43 17.78,90.16 21.59,90.16 22.23,89.53 D8.A
N$28
  Top 0.61: P22.2 9.01,95.61 D6.A
N$29
  Top 0.61: P27.2 94.34,84.44 Q5.3 89.85,84.13 J22.2
N$30
  Top 0.305: R41.2 81.73,60.78 U10.5
PWR_SW_1
  Top 0.61: U9.5 89.7,68.4 93.71,64.39 P15.2
  Bottom 0.61: P15.2 94.34,64.39 93.34,65.39 93.34,69.84 95.89,72.38 J32.1
PWR_SW_22
  Top 0.61: U4.5 89.7,18.88 93.71,14.88 P13.2
  Bottom 0.61: P13.2 94.34,14.88 93.34,15.88 93.34,20.32 95.89,22.86 J12.1
RX  (via drill 0.35)
  Top 0.305: U2.24 77.51,42.55 v79.38,42.55 | J3.4 69.83,17.12 69.83,8.26 72.37,5.71 P7.3
  Bottom 0.305: v79.38,42.55 78.42,41.59 78.42,26.99 71.12,19.68 J3.4
RX1  (via drill 0.35)
  Top 0.305: U6.24 77.51,92.06 v79.38,92.06 | J31.4 69.83,66.64 69.83,57.77 72.37,55.23 P19.3
  Bottom 0.305: v79.38,92.06 78.42,91.11 78.42,76.51 71.12,69.2 J31.4
TX  (via drill 0.35)
  Top 0.305: J3.5 68.6,18.39 68.6,6.99 69.87,5.71 P7.2 | U2.25 79.24,43.99 v79.38,44.13
  Bottom 0.305: v79.38,44.13 77.79,42.55 77.79,27.3 68.9,18.41 J3.5
TX1  (via drill 0.35)
  Top 0.305: J31.5 68.6,67.92 68.6,56.51 69.87,55.23 P19.2 | U6.25 79.24,93.52 v79.38,93.65
  Bottom 0.305: v79.38,93.65 77.79,92.06 77.79,76.83 68.9,67.94 J31.5
UART_VCC
  Top 0.508: P7.4 74.87,5.08 71.06,8.89 71.06,15.18 73.66,17.78 J3.3 73.66,20.95 81.28,28.57 93.34,28.57 94.61,27.3 J12.2
UART_VCC1
  Top 0.508: P19.4 74.87,54.6 71.06,58.41 71.06,64.7 73.66,67.3 J31.3 73.66,70.47 81.28,78.09 93.34,78.09 94.61,76.83 J32.2
VCC  (via drill 0.35)
  Top 0.305: R17.1 7.96,17.74 | R16.1 8.59,17.74 | 16.57,1.33 16.51,1.27 | 37.15,21.59 R6.2 | R8.2 86.36,33.34 Q1.2 | U1.5 88.9,13.34 97.73,13.34 | P9.4 50.74,30.8 55.56,30.8
  Top 0.508: Q3.2 42.87,20.32 R3.2 42.23,21.27 v41.91,21.59 | R18.2 22.86,16.51 R19.2 20.95,15.24 19.05,13.34 J1.1 16.57,8.95 P2.1 16.57,1.33 | P1.1 3.87,1.97 3.81,1.91 4.45,1.27 16.51,1.27 26.67,1.27 62.23,1.27 | 62.23,1.27 97.16,1.27 97.73,1.84 | v35.56,21.59 37.15,21.59 | P6.6 62.23,4.34 62.23,1.27 | Q1.2 87,31.43 J18.1 87.31,30.16 87.95,29.53 95.25,29.53 95.57,29.84 | Q2.2 37.15,18.73 36.66,19.21 | 28.89,12.69 28.89,9.53
  Top 0.61: R17.1 8.26,18.41 9.53,19.68 13.34,19.68 J2.1 16.51,23.81 17.78,25.08 26.99,25.08 32.7,30.8 | 32.7,30.8 32.7,35.56 J14.2 33.97,39.36 R11.2 34.62,47.32 35.56,48.26 36.13,48.26 36.2,48.2 54.67,48.2 55.99,46.88 C3.1 56.64,46.54 56.66,46.53 U2.2 | 32.7,30.8 55.56,30.8 56.52,29.84 R10.2 | 97.73,1.84 97.73,13.34 97.73,19.94 | 8.59,17.74 7.96,17.74 7.58,17.74 5.62,15.78 P12.1 J11.1 3.81,4.5 P1.1 | 95.57,29.84 J12.3 96.46,29.84 97.73,28.57 97.73,19.94 | C10.2 85.39,24.43 84.77,23.81 U4.1 84.92,21.76 86.73,19.95 97.74,19.95 97.73,19.94 | R6.2 37.16,19.71 36.66,19.21 C8.1 35.56,17.46 34.29,16.19 30.8,16.19 30.48,15.88 R22.2 28.89,12.69 | 26.67,1.27 26.67,7.3 28.89,9.53
  Bottom 0.508: v41.91,21.59 v35.56,21.59
VCC1  (via drill 0.35)
  Top 0.305: R37.1 7.96,67.26 | R36.1 8.59,67.26 | 16.57,50.85 16.51,50.79 | 37.15,71.11 R25.2 | R27.2 86.36,82.86 Q5.2 | U8.5 88.9,62.85 97.73,62.85 | P28.4 50.74,80.32 55.56,80.32
  Top 0.508: Q4.2 42.87,69.84 R23.2 42.23,70.79 v41.91,71.11 | R38.2 22.86,66.03 R39.2 20.95,64.76 19.05,62.85 J27.1 16.57,58.47 P20.1 16.57,50.85 | P21.1 3.87,51.48 3.81,51.42 4.45,50.79 16.51,50.79 26.67,50.79 62.23,50.79 | 62.23,50.79 97.16,50.79 97.73,51.36 | v35.56,71.11 37.15,71.11 | P26.6 62.23,53.87 62.23,50.79 | Q5.2 87,80.95 J22.1 87.31,79.68 87.95,79.05 95.25,79.05 95.57,79.36 | Q6.2 37.15,68.25 36.66,68.73 | 28.89,62.21 28.89,59.05
  Top 0.61: R37.1 8.26,67.94 9.53,69.2 13.34,69.2 J13.1 16.51,73.33 17.78,74.6 26.99,74.6 32.7,80.32 | 32.7,80.32 32.7,85.08 J25.2 33.97,88.88 R31.2 34.62,96.84 35.56,97.78 36.13,97.78 36.2,97.72 54.67,97.72 55.99,96.4 C18.1 56.64,96.06 56.66,96.06 U6.2 | 32.7,80.32 55.56,80.32 56.52,79.36 R29.2 | 97.73,51.36 97.73,62.85 97.73,69.46 | 8.59,67.26 7.96,67.26 7.58,67.26 5.62,65.3 P23.1 J28.1 3.81,54.02 P21.1 | 95.57,79.36 J32.3 96.46,79.36 97.73,78.09 97.73,69.46 | C20.2 85.39,73.95 84.77,73.33 U9.1 84.92,71.28 86.73,69.47 97.74,69.47 97.73,69.46 | R25.2 37.16,69.23 36.66,68.73 C19.1 35.56,66.98 34.29,65.71 30.8,65.71 30.48,65.39 R42.2 28.89,62.21 | 26.67,50.79 26.67,56.82 28.89,59.05
  Bottom 0.508: v41.91,71.11 v35.56,71.11
VIN  (via drill 0.3 pad 0.61, 0.35)
  Top 0.305: v79.69,15.24 79.69,15.09 U5.1
  Top 0.508: 22.26,34.96 D4.C 22.23,32.07 | U3.3 20.96,31.75 21.27,32.07 22.23,32.07 | 22.23,32.07 22.54,32.07 22.86,31.75 U3.1
  Top 0.61: D2.C 11.43,40.4 14.85,40.4 17.39,37.85 D1.C 19.89,34.96 22.26,34.96 | U3.3 20.49,30.48 19.05,30.48 19.04,30.47 17.78,30.47 C6.1 15.86,30.15 v14.92,29.21 | U3.1
  Bottom 0.305: v79.69,15.24 72.07,7.62 2.22,7.62 1.27,8.57 1.27,18.73 2.22,19.68 3.9,19.68
  Bottom 0.61: v14.92,29.21 14.29,28.57 14.29,21.91 12.06,19.68 3.9,19.68 P12.3
VIN1  (via drill 0.3 pad 0.61, 0.35)
  Top 0.305: v79.69,64.76 79.69,64.61 U10.1
  Top 0.508: 22.26,84.48 D8.C 22.23,81.59 | U7.3 20.96,81.27 21.27,81.59 22.23,81.59 | 22.23,81.59 22.54,81.59 22.86,81.27 22.86,79.54
  Top 0.61: D6.C 11.43,89.92 14.85,89.92 17.39,87.38 D5.C 19.89,84.48 22.26,84.48 | U7.3 20.49,80 19.05,80 19.04,79.99 17.78,79.99 C16.1 15.86,79.67 v14.92,78.73
  Bottom 0.305: v79.69,64.76 72.07,57.14 2.22,57.14 1.27,58.09 1.27,68.25 2.22,69.2 3.9,69.2
  Bottom 0.61: v14.92,78.73 14.29,78.09 14.29,71.43 12.06,69.2 3.9,69.2 P23.3
VIN_DIV
  Top 0.305: R21.1 R20.1 85.42,14.91 86.68,13.65 86.68,12.38 87.25,11.81 U1.1
VIN_DIV1
  Top 0.305: R41.1 R40.1 85.42,64.43 86.68,63.17 86.68,61.9 87.25,61.33 U8.1

## Text on the board
tPlace: Vin | G | G | 3V3 | perm | ESP32-C6 Prototyper / Adam Cooper 2025 / Version 1.1 | sw22 | 3V3 | GND | SCL | SDA | Vin | G | TX | RX | 3V3 | GND | G | 3V3 | 3V3 | MIC2005A | 3V3 | GND | SCL | SDA | 3V3 | GND | SCL | SDA | GND | #15 | #3* | GND | #4* | #5* | GND | #18 | #19 | #20 | #21 | 3V3 | GND | TX | RX | 3V3 | GND | ADC | #4* | GND | #22 | #23 | Vin | G | G | 3V3 | perm | ESP32-C6 Prototyper / Adam Cooper 2025 / Version 1.1 | sw22 | 3V3 | GND | SCL | SDA | Vin | G | TX | RX | G | 3V3 | GND | 3V3 | 3V3 | MIC2005A | GND | GND | 3V3 | GND | SCL | SDA | 3V3 | GND | SCL | SDA | GND | #15 | #3* | #4* | #5* | #18 | #19 | #20 | #21 | 3V3 | GND | TX | RX | 3V3 | GND | ADC | #4* | GND | #22 | #23
bPlace: ESP32-C6 Prototyper / Adam Cooper 2025 / Version 1.1 | 3V3 | GND | #7* | #6* | 3V3 | GND | #10 | #11 | GND | #15 | #3* | GND | #4* | #5* | GND | #18 | #19 | #20 | #21 | 3V3 | GND | TX | RX | 3V3 | GND | #2* | #4* | GND | #22 | #23 | ESP32-C6 Prototyper / Adam Cooper 2025 / Version 1.1 | 3V3 | GND | #7* | #6* | 3V3 | GND | #10 | #11 | GND | #15 | #3* | GND | #4* | #5* | GND | #18 | #19 | #20 | #21 | 3V3 | GND | TX | RX | 3V3 | GND | #2* | #4* | GND | #22 | #23
Milling: v-score
_tNames: C3 | J10 | LED1 | C4 | C5 | P11 | C9 | P14 | R1 | J19 | LED2 | D2 | C1 | R14 | R2 | S1 | J14 | X1 | R11 | D4 | D1 | D3 | C2 | R8 | Q1 | P10 | U3 | R10 | J17 | J18 | C6 | C7 | P9 | C10 | R9 | R13 | R12 | R15 | J2 | R6 | R3 | J12 | R17 | J15 | J16 | C8 | J3 | R18 | Q3 | Q2 | R21 | R20 | R19 | P13 | P12 | J6 | J7 | R16 | R4 | J11 | J1 | R7 | R5 | R22 | J8 | J9 | P1 | P2 | P3 | P4 | P6 | P7 | P5 | P8 | J10 | C4 | C3 | LED1 | C5 | P11 | C9 | P14 | J19 | LED2 | R1 | D2 | R14 | R2 | C1 | J14 | S1 | X1 | R11 | D1 | D4 | D3 | C2 | R8 | Q1 | P10 | U3 | R10 | J18 | J17 | C6 | C7 | P9 | C10 | R9 | R12 | R13 | R15 | J2 | R3 | J12 | R6 | R17 | C8 | J15 | J16 | J3 | R18 | Q3 | R20 | Q2 | R21 | R19 | P13 | P12 | R16 | J6 | J7 | R4 | J11 | J1 | R22 | R7 | R5 | J8 | J9 | P7 | P1 | P2 | P3 | P4 | P6 | P5 | P8
_tValues: BAT1 | U2 | U4 | U5 | U1 | BAT1 | U2 | U4 | U5 | U1